# EAGLE board DC_Sensor_ESP8266_ADC_NC_11 (EAGLE 7.5.0)
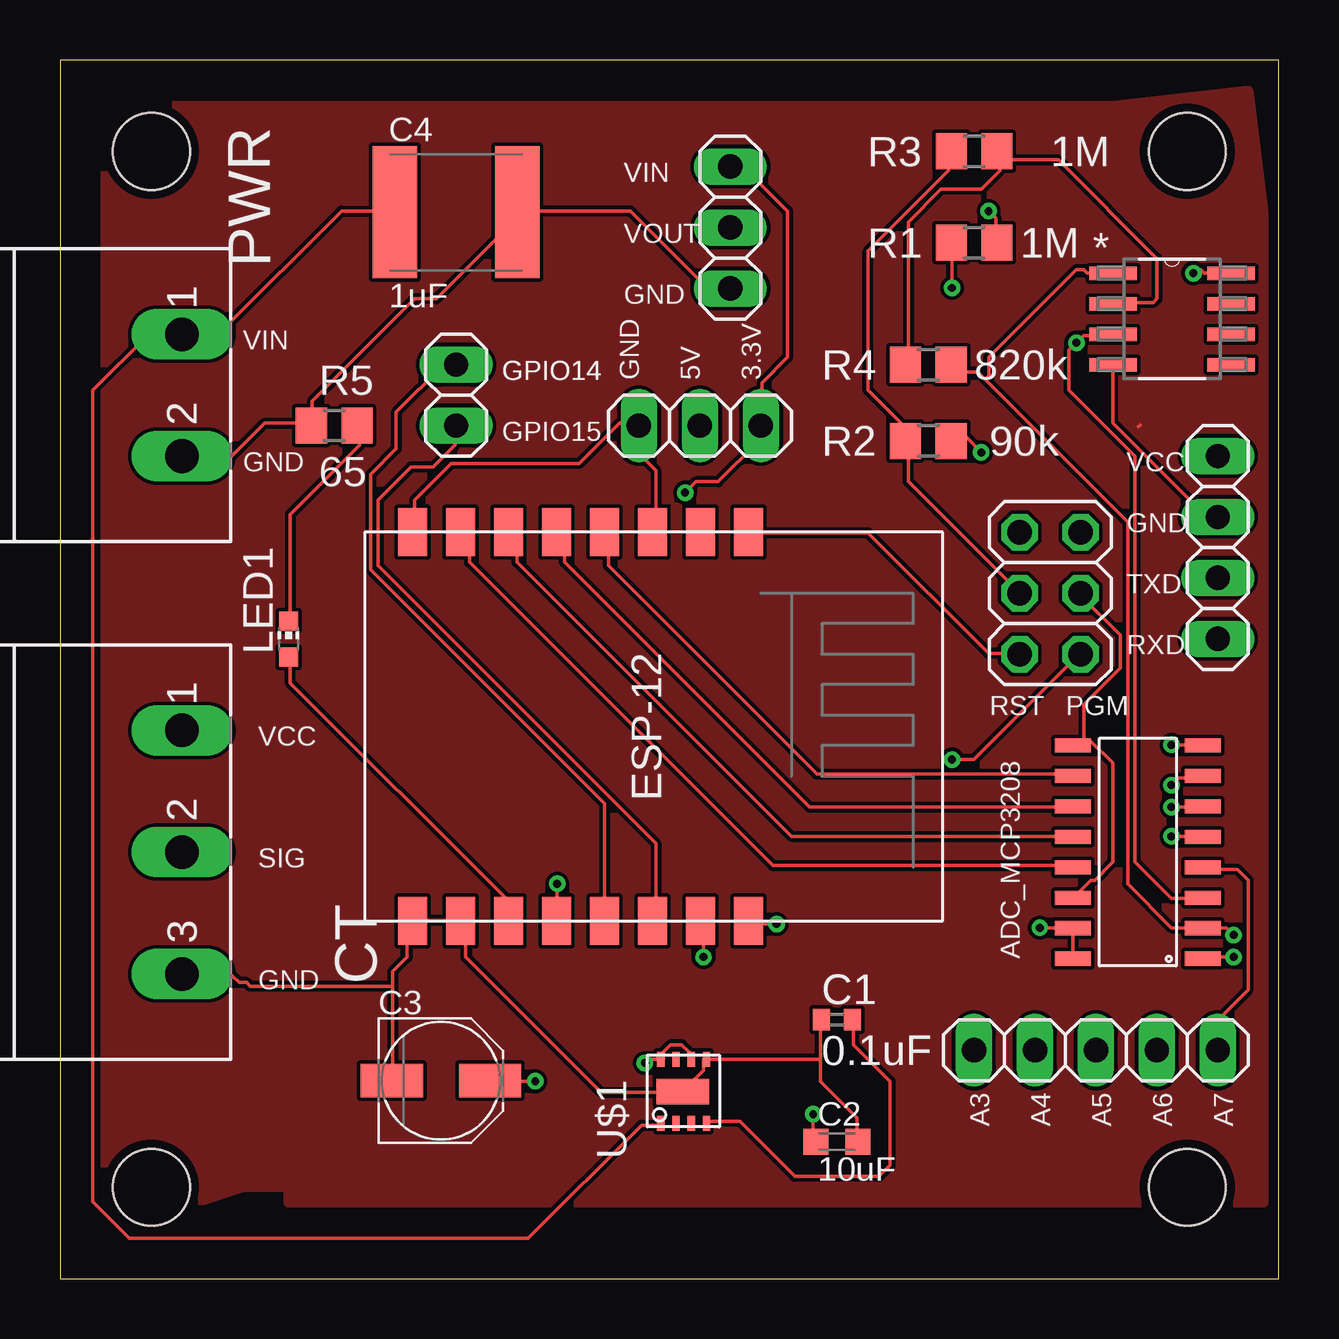
[diagram p0: board, top side]
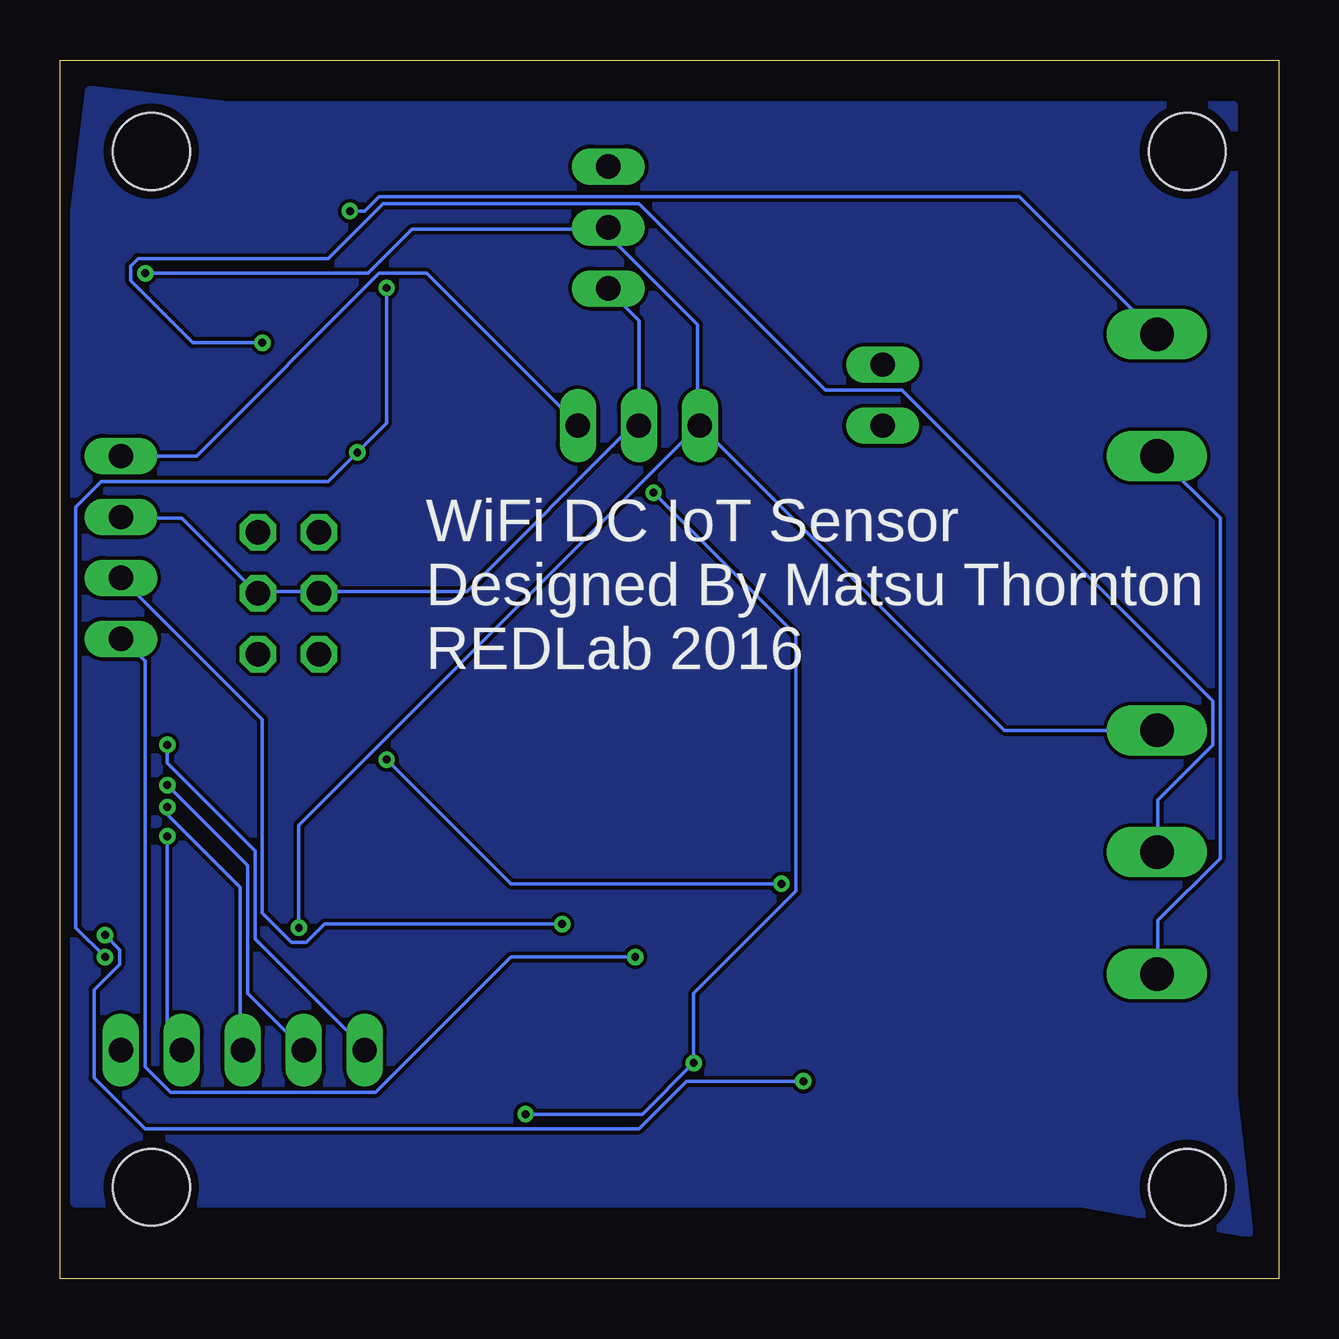
[diagram p1: board, bottom side, seen from below]

Size 50.8 x 50.8 mm. Coordinates in mm from the lower left corner, seen from the top.
Outline: 0,0 50.8,0 50.8,50.8 0,50.8 0,0
Copper layers (1*16): Top 0.0356mm / dielectric 1.5011mm / Bottom 0.0356mm
Design rules "LaenPCBOrder": minimum track width 6mil, minimum drill 13mil, track to track 6mil, track to pad 6mil, pad to pad 6mil, via to via 6mil, smd to smd 6mil, copper to edge 15mil, drill to drill 6mil, minimum pad ring 7mil, minimum via ring 7mil, stop-mask expansion 3mil, vias tented up to drill 0mil, thermal gap 10mil
Holes 3.2 mm at 3.81,46.99 46.99,46.99 46.99,3.81 3.81,3.81

## Footprints (pad centres in the part's own frame; a part is rotated, then mirrored left to right if it is on the bottom)
PDIP16 = smd 0.6 x 1.5: P$1 0,0; P$2 1.27,0; P$3 2.54,0; P$4 3.81,0; P$5 5.08,0; P$6 6.35,0; P$7 7.62,0; P$8 8.89,0; P$9 8.89,5.4; P$10 7.62,5.4; P$11 6.35,5.4; P$12 5.08,5.4; P$13 3.81,5.4; P$14 2.54,5.4; P$15 1.27,5.4; P$16 0,5.4
C0402 = smd 0.7 x 0.9: 1 -0.65,0; 2 0.65,0
C0603K = smd 1.05 x 1.08: 1 -0.875,0; 2 0.875,0
PANASONIC_C = smd 2.6 x 1.4: + 2.05,0; - -2.05,0
C2220K = smd 1.85 x 5.5: 1 -2.55,0; 2 2.55,0
MSTBA3 = drill 1.397 long: 1 -5.08,5.08; 2 0,5.08; 3 5.08,5.08
1X04 = drill 1.016 long: 1 -3.81,0; 2 -1.27,0; 3 1.27,0; 4 3.81,0
1X05 = drill 1.016 long: 1 -5.08,0; 2 -2.54,0; 3 0,0; 4 2.54,0; 5 5.08,0
1X02 = drill 1.016 long: 1 -1.27,0; 2 1.27,0
1X03 = drill 1.016 long: 1 -2.54,0; 2 0,0; 3 2.54,0
CHIP-LED0603 = smd 0.8 x 0.8: A 0,-0.75; C 0,0.75
ESP8266-ESP12 = smd 2 x 1.2: 1 0,16; 2 0,14; 3 0,12; 4 0,10; 5 0,8; 6 0,6; 7 0,4; 8 0,2; 9 16.2,2; 10 16.2,4; 11 16.2,6; 12 16.2,8; 13 16.2,10; 14 16.2,12; 15 16.2,14; 16 16.2,16
MSTBA2 = drill 1.397 long: 1 -2.54,5.08; 2 2.54,5.08
R0805 = smd 1.3 x 1.5: 1 -0.95,0; 2 0.95,0
2X03 = drill 1.016 octagon: 1 -2.54,-1.27; 2 -2.54,1.27; 3 0,-1.27; 4 0,1.27; 5 2.54,-1.27; 6 2.54,1.27
SOIC127P600X175-8N = smd 1.981 x 0.559: 1 -2.464,1.905; 2 -2.464,0.635; 3 -2.464,-0.635; 4 -2.464,-1.905; 5 2.464,-1.905; 6 2.464,-0.635; 7 2.464,0.635; 8 2.464,1.905
8-VDFN = smd 2.184 x 1.067: EXP 1.194,1.448 | smd 0.305 x 0.61: P$1 0.279,0.127; P$2 0.914,0.127; P$3 1.549,0.127; P$4 2.184,0.127; P$5 2.184,2.794; P$6 1.549,2.794; P$7 0.914,2.794; P$8 0.279,2.794
3PVREG = drill 1.016 long: 1 -2.54,0; 2 0,0; 3 2.54,0

## Placement (x,y rotation side)
ADC_MCP3208  [PDIP16]  47.62,13.34 90 top
C1  0.1uF  [C0402]  32.38,10.79 0 top
C2  10uF  [C0603K]  32.38,5.71 0 top
C3  47uF  [PANASONIC_C]  15.88,8.26 0 top
C4  1uF  [C2220K]  16.51,44.45 0 top
CT  MSTBA3  [MSTBA3]  0,17.78 270 top
JP1  IO  [1X04]  48.26,30.48 90 top
JP2  [1X05]  43.18,9.53 0 top
JP3  [1X02]  16.51,36.83 90 top
JP4  [1X03]  26.67,35.56 180 top
LED1  [CHIP-LED0603]  9.53,26.67 0 top
MDL1  [ESP8266-ESP12]  12.7,31.11 270 top
PWR  MSTBA2  [MSTBA2]  0,36.83 270 top
R1  1M  [R0805]  38.1,43.18 0 top
R2  90k  [R0805]  36.2,34.92 0 top
R3  1M  [R0805]  38.1,46.99 0 top
R4  820k  [R0805]  36.2,38.1 0 top
R5  65  [R0805]  11.43,35.56 0 top
SV1  RESET  [2X03]  41.27,28.57 90 top
U1  TLV272CDG4  [SOIC127P600X175-8N]  46.35,40.01 0 top
U$1  MIC5283QFD-8  [8-VDFN]  24.77,6.35 0 top
U$2  3.3VREG  [3PVREG]  27.94,43.81 90 top

## Library data of the parts
ADC_MCP3208 = MCP3208
C1 = rcl; MFG#: GRM155R71C104KA88J
C2 C3 R1-R5 = rcl
C4 = rcl; MFG#: C5750X7R2E105M230KA
CT = con-phoenix-508; MF: FARNELL; MPN: 1757255; OC_FARNELL: 3705183; OC_NEWARK: 71C4162
JP1-JP4 SV1 = pinhead
LED1 = led
MDL1 = ESP8266-ESP12
PWR = con-phoenix-508; MF: FARNELL; MPN: 1757242; OC_FARNELL: 3705171; OC_NEWARK: 71C4161
U1 = Texas Instruments_By_element14_Batch_1; MPN: TLV272CDG4; OC_FARNELL: 1234856; OC_NEWARK: 13M5572; PACKAGE: SOIC-8; SUPPLIER: TI; TYPE: OPAMP
U$1 = vreg
U$2 = vreg2

## Nets
3.3V: ADC_MCP3208.P$15 ADC_MCP3208.P$16 CT.1 JP4.3 MDL1.3 MDL1.8 U1.8 U$2.2
5V: C2.1 JP1.4 JP4.1 U$1.P$6 U$1.P$8 U$2.3
CT_SIG: ADC_MCP3208.P$3 CT.2 U1.3
CT_SIG_AMPLIFIED: ADC_MCP3208.P$2 C3.+ R4.2 U1.1
GND: ADC_MCP3208.P$9 ADC_MCP3208.P$14 C1.1 C2.2 C3.- C4.2 CT.3 JP1.3 JP4.2 MDL1.9 MDL1.10 PWR.2 R2.1 R3.1 R5.1 SV1.3 SV1.4 U1.4 U$1.EXP U$1.P$5 U$2.1
GPIO0: MDL1.12 SV1.1
GPIO12: ADC_MCP3208.P$12 MDL1.6
GPIO13: ADC_MCP3208.P$13 MDL1.7
GPIO14: ADC_MCP3208.P$11 MDL1.5
GPIO16: ADC_MCP3208.P$10 MDL1.4
N$1: LED1.A MDL1.11
N$2: R3.2 R4.1 U1.2
N$3: LED1.C R5.2
N$4: C1.2 U$1.P$4
N$7: JP3.1 MDL1.14
N$8: JP3.2 MDL1.13
N$9: ADC_MCP3208.P$4 JP2.5
N$10: ADC_MCP3208.P$5 JP2.4
N$11: ADC_MCP3208.P$6 JP2.3
N$12: ADC_MCP3208.P$7 JP2.2
N$13: ADC_MCP3208.P$8 JP2.1
RESET: MDL1.1 SV1.2
RXD: JP1.1 MDL1.15
TXD: JP1.2 MDL1.16
VIN: C4.1 PWR.1 R1.2 U$1.P$1
VSENSE: ADC_MCP3208.P$1 R1.1 R2.2

## Tracks (layer width: path | path; a pad name or v marks a point on that pad's centre or on a via)
3.3V  (via drill 0.33)
  Top 0.152: U1.8 47.7,41.91 47.55,42.06 47.4,42.06 v47.24,41.91 | ADC_MCP3208.P$16 42.22,13.41 42.22,14.48 ADC_MCP3208.P$15 42.22,14.63 v40.84,14.63 | MDL1.8 14.78,31.24 14.78,32.46 16.31,33.98 21.64,33.98 23.32,35.66 24.08,35.66 JP4.3 24.23,35.51 24.23,34.29 24.84,33.68 24.84,31.24 MDL1.3
  Bottom 0.152: v47.24,41.91 37.95,41.91 36.12,43.74 28.04,43.74 U$2.2 27.89,43.74 27.89,43.43 24.23,39.78 24.23,35.66 JP4.3 | v40.84,14.63 40.84,18.9 24.23,35.51 JP4.3 | CT.1 11.43,22.86 JP4.3
5V  (via drill 0.33)
  Top 0.152: 25.15,9.45 25.15,9.14 U$1.P$8 | 25.15,9.45 25.45,9.75 25.91,9.75 26.21,9.45 26.21,9.14 U$1.P$6 | v31.39,6.86 31.39,5.79 C2.1 | v24.38,8.99 24.54,9.14 24.84,9.14 25.15,9.45 | U$2.3 28.04,46.33 28.5,46.33 30.33,44.5 30.33,38.41 29.26,37.34 29.26,35.66 JP4.1 29.11,35.51 29.11,34.9 27.43,33.22 26.52,33.22 v26.06,32.77
  Bottom 0.152: v31.39,6.86 26.52,6.86 v24.38,8.99 24.38,11.89 20.12,16.15 20.12,26.82 v26.06,32.77 | JP1.4 45.11,34.29 37.49,41.91 35.51,41.91 29.26,35.66 JP4.1
CT_SIG  (via drill 0.33)
  Top 0.152: ADC_MCP3208.P$3 47.55,15.85 46.33,15.85 44.81,17.37 44.81,34.29 42.06,37.03 42.06,38.71 v42.37,39.01 42.67,39.32 43.89,39.32 U1.3
  Bottom 0.152: v42.37,39.01 45.26,39.01 47.85,41.6 47.85,42.22 47.55,42.52 39.62,42.52 37.34,44.81 26.67,44.81 18.9,37.03 15.7,37.03 2.74,24.08 2.74,22.25 5.03,19.96 5.03,17.83 CT.2
CT_SIG_AMPLIFIED  (via drill 0.33)
  Top 0.152: 38.56,37.49 38.25,37.8 37.49,37.8 37.19,38.1 R4.2 | 38.56,37.49 44.5,31.55 44.5,16.46 46.33,14.63 47.55,14.63 ADC_MCP3208.P$2 47.7,14.63 48.62,14.63 v48.92,14.33 | U1.1 42.82,41.91 42.67,42.06 42.37,42.06 38.71,38.41 38.71,37.64 38.56,37.49 | v19.81,8.23 17.98,8.23 C3.+
  Bottom 0.152: v19.81,8.23 24.69,8.23 26.67,6.25 47.24,6.25 49.38,8.38 49.38,12.04 48.31,13.11 48.31,13.72 v48.92,14.33
GND
  Top 0.152: 31.7,9.14 31.7,8.23 33.22,6.71 33.22,5.79 C2.2 | 31.7,9.14 31.7,10.67 C1.1 | 31.7,9.14 U$1.P$5 26.82,9.14 26.82,8.69 26.06,7.92 U$1.EXP 25.91,7.77 22.55,7.77 16.92,13.41 16.92,14.63 16.76,14.78 MDL1.10 16.61,14.94 14.78,14.94 MDL1.9 14.63,14.78 14.48,14.63 14.48,13.41 13.87,12.8 13.87,12.19 | 13.87,12.19 13.87,8.38 C3.- | 13.87,12.19 7.92,12.19 7.77,12.34 7.47,12.34 7.16,12.65 5.18,12.65 CT.3 | PWR.2 7.16,34.29 8.53,35.66 10.36,35.66 R5.1 10.52,35.66 10.52,36.58 14.78,40.84 15.7,40.84 19.2,44.35 C4.2 19.2,44.5 23.77,44.5 26.98,41.3 27.89,41.3 U$2.1 | U1.4 43.89,35.66 47.7,31.85 48.16,31.85 JP1.3 | 42.67,22.4 42.52,22.4 42.37,22.25 ADC_MCP3208.P$9 42.67,22.4 | 42.67,22.4 42.98,22.4 43.89,21.49 43.89,17.37 43.13,16.61 42.98,16.61 42.37,16 ADC_MCP3208.P$14 | SV1.4 35.36,33.22 35.36,34.9 R2.1 35.2,35.05 35.2,35.51 33.68,37.03 33.68,42.82 37.03,46.18 37.03,46.94 R3.1 | 42.67,22.4 42.67,23.93 44.2,25.45 44.2,26.82 42.52,28.5 SV1.3
  Bottom 0.152: U$2.1 27.89,41.15 26.67,39.93 JP4.2 26.67,35.51 26.98,35.51 33.83,28.65 39.93,28.65 SV1.4 40.08,28.65 42.52,28.65 SV1.3 42.67,28.65 45.72,31.7 48.16,31.7 JP1.3 | CT.3 5.03,12.8 5.03,14.94 2.44,17.53 2.44,31.7 5.03,34.29 PWR.2
GPIO0  (via drill 0.33)
  Top 0.152: v20.73,16.46 20.73,14.94 MDL1.12 | v37.19,21.64 38.1,21.64 42.52,26.06 SV1.1
  Bottom 0.152: v20.73,16.46 32,16.46 v37.19,21.64
GPIO12
  Top 0.152: ADC_MCP3208.P$12 42.22,18.44 30.48,18.44 19.05,29.87 19.05,30.79 18.75,31.09 MDL1.6
GPIO13
  Top 0.152: ADC_MCP3208.P$13 42.22,17.22 29.72,17.22 17.07,29.87 17.07,30.79 16.76,31.09 MDL1.7
GPIO14
  Top 0.152: ADC_MCP3208.P$11 42.22,19.66 31.24,19.66 21.03,29.87 21.03,30.79 20.73,31.09 MDL1.5
GPIO16
  Top 0.152: ADC_MCP3208.P$10 42.22,21.03 31.55,21.03 22.86,29.72 22.86,30.94 22.71,31.09 MDL1.4
N$1
  Top 0.152: LED1.A 9.6,25.91 9.6,24.84 18.59,15.85 18.59,14.94 MDL1.11
N$2
  Top 0.152: 39.17,46.63 39.17,46.94 R3.2 39.17,46.63 | 39.17,46.63 39.17,46.18 38.41,45.41 36.73,45.41 35.36,44.04 35.36,38.1 R4.1 | 39.17,46.63 41.6,46.63 45.72,42.52 45.72,40.84 45.57,40.69 43.89,40.69 U1.2
N$3
  Top 0.152: LED1.C 9.6,27.43 9.6,31.85 12.5,34.75 12.5,35.51 R5.2
N$4
  Top 0.152: U$1.P$4 26.98,6.55 28.35,6.55 30.63,4.27 34.14,4.27 34.59,4.72 34.59,8.23 33.07,9.75 33.07,10.67 C1.2
N$5
  Top 0.152: 44.96,35.51 45.03,35.59
  pour Top: 1.91,48.9 43.81,48.9 49.53,49.53 50.16,44.45 50.16,3.17 9.53,3.17 9.53,3.81 7.62,3.81 1.91,1.91
N$6
  pour Bottom: 43.81,48.9 1.91,48.9 1.91,7.62 1.27,1.91 8.26,3.17 50.16,3.17 50.16,44.45 49.53,49.53
N$7
  Top 0.152: MDL1.14 24.84,14.94 24.84,18.14 13.26,29.72 13.26,32.46 14.63,33.83 15.54,33.83 16.46,34.75 16.46,35.51 JP3.1
N$8
  Top 0.152: JP3.2 16,38.1 14.02,36.12 14.02,34.59 12.95,33.53 12.95,29.57 22.71,19.81 22.71,14.94 MDL1.13
N$9
  Top 0.152: ADC_MCP3208.P$4 47.7,17.07 49.07,17.07 49.53,16.61 49.53,12.04 48.31,10.82 48.31,9.6 JP2.5
N$10  (via drill 0.33)
  Top 0.152: v46.33,18.44 47.55,18.44 ADC_MCP3208.P$5
  Bottom 0.152: v46.33,18.44 46.33,10.21 45.72,9.6 JP2.4
N$11  (via drill 0.33)
  Top 0.152: v46.33,19.66 47.55,19.66 ADC_MCP3208.P$6
  Bottom 0.152: v46.33,19.66 46.33,19.36 43.28,16.31 43.28,9.6 JP2.3
N$12  (via drill 0.33)
  Top 0.152: v46.33,20.57 46.63,20.88 47.55,20.88 ADC_MCP3208.P$7
  Bottom 0.152: v46.33,20.57 42.98,17.22 42.98,11.89 40.69,9.6 JP2.2
N$13  (via drill 0.33)
  Top 0.152: v46.33,22.25 47.55,22.25 ADC_MCP3208.P$8
  Bottom 0.152: v46.33,22.25 46.33,21.49 42.67,17.83 42.67,14.17 38.1,9.6 JP2.1
RESET
  Top 0.152: MDL1.1 28.8,31.09 33.68,31.09 38.71,26.06 39.93,26.06 SV1.2
RXD  (via drill 0.33)
  Top 0.152: v26.82,13.41 26.82,14.78 MDL1.15
  Bottom 0.152: v26.82,13.41 32,13.41 37.64,7.77 46.18,7.77 47.24,8.84 47.24,25.76 48.16,26.67 JP1.1
TXD  (via drill 0.33)
  Top 0.152: v29.87,14.78 28.8,14.78 MDL1.16
  Bottom 0.152: v29.87,14.78 39.78,14.78 40.54,14.02 41.15,14.02 42.37,15.24 42.37,23.32 JP1.2
VIN  (via drill 0.33)
  Top 0.152: U$1.P$1 24.99,6.4 24.23,6.4 19.51,1.68 2.9,1.68 1.37,3.2 1.37,37.03 3.66,39.32 5.03,39.32 PWR.1 5.18,39.47 6.71,39.47 11.73,44.5 13.87,44.5 C4.1 | v38.71,44.5 39.01,44.2 39.01,43.28 R1.2
  Bottom 0.152: v38.71,44.5 38.1,44.5 37.49,45.11 10.82,45.11 PWR.1
VSENSE  (via drill 0.33)
  Top 0.152: v48.92,13.41 47.7,13.41 ADC_MCP3208.P$1 | v38.41,34.44 37.8,35.05 37.19,35.05 R2.2 | v37.19,41.3 37.19,43.13 R1.1
  Bottom 0.152: v48.92,13.41 50.14,14.63 50.14,32.16 49.07,33.22 39.62,33.22 v38.41,34.44 37.19,35.66 v37.19,41.3

## Text on the board
bPlace: WiFi DC IoT Sensor / Designed By Matsu Thornton / REDLab 2016
tNames: VIN | VOUT | GND | VIN | GPIO14 | GPIO14 | GND | 5V | 3.3V | GPIO15 | GND | VCC | GND | TXD | RXD | RST | PGM | VCC | SIG | GND | A3 | A4 | A5 | A6 | A7